# EAGLE board Ej6_EM (EAGLE 9.7.0)

Size 132.1 x 72.15 mm. Coordinates in mm from the lower left corner, seen from the top.
Outline: 0,0 132.1,0 132.1,72.15 0,72.15 0,0
Copper layers (1*16): Top 0.035mm / dielectric 1.5mm / Bottom 0.035mm
Design rules "default": minimum track width 6mil, minimum drill 0.35mm, track to track 6mil, track to pad 6mil, pad to pad 6mil, via to via 6mil, smd to smd 6mil, copper to edge 40mil, drill to drill 6mil, minimum pad ring 10mil, minimum via ring 8mil, stop-mask expansion 4mil, vias tented up to drill 0mil, thermal gap 10mil

## Footprints (pad centres in the part's own frame; a part is rotated, then mirrored left to right if it is on the bottom)
CAP-THRU-2.54MM = drill 1.016 pad 1.88: 1 -1.27,0; 2 1.27,0
LEDRD254W60D565H860B = drill 0.981 pad 1.581: 1 -1.27,0; 2 1.27,0
LEDRD254W60D565H860B_G = drill 0.981 pad 1.581: 1 -1.27,0; 2 1.27,0
INDRD2743W50D3810H2616B = drill 0.708 pad 1.308: 1 -13.716,0; 2 13.716,0
BATTERY-GENERIC = drill 1.118 pad 3.15 octagon: + 2.54,0; - -2.54,0
RESAD1016W63L850D250B = drill 0.83 pad 1.43: 1 -5.08,0; 2 5.08,0
HA-06-SM065 = drill 1 pad 1.676: 1 -2.54,-2.54; 2 0,2.54; 3 2.54,-2.54
SWITCH-SPDT-PTH-8.5X3.7MM = drill 1.016 pad 1.88: 1 -2.54,0; 2 0,0; 3 2.54,0

## Placement (x,y rotation side)
C1  100n  [CAP-THRU-2.54MM]  70.39,29.91 0 top
D1  RED  [LEDRD254W60D565H860B]  116.11,34.98 180 top
D2  RED  [LEDRD254W60D565H860B]  78.01,27.36 180 top
D3  GREEN  [LEDRD254W60D565H860B_G]  57.69,29.91 180 top
D4  RED  [LEDRD254W60D565H860B]  116.11,27.36 180 top
D5  GREEN  [LEDRD254W60D565H860B_G]  105.95,37.52 180 top
D6  GREEN  [LEDRD254W60D565H860B_G]  105.95,29.91 180 top
L1  10u  [INDRD2743W50D3810H2616B]  46.26,22.29 270 top
P1  BATTERYGENERIC  [BATTERY-GENERIC]  11.49,62.4 180 top
R1  1k  [RESAD1016W63L850D250B]  76.74,22.29 90 top
R2  1k  [RESAD1016W63L850D250B]  56.42,22.29 90 top
R3  1k  [RESAD1016W63L850D250B]  71.66,22.29 90 top
R4  1k  [RESAD1016W63L850D250B]  114.84,22.29 90 top
R5  1k  [RESAD1016W63L850D250B]  104.68,22.29 90 top
RPOT1  100k  [HA-06-SM065]  125.05,65.1 0 top
S1  TOGGLE  [SWITCH-SPDT-PTH-8.5X3.7MM]  7.42,43.29 0 top

## Library data of the parts
C1 P1 R1-R5 RPOT1 S1 = Tinkercad
D1 D2 D4 = Tinkercad; CATEGORY: Opto-Electronic; SUB-CATEGORY: LED; VALUE: LED_RED
D3 D5 D6 = Tinkercad; CATEGORY: Opto-Electronic; SUB-CATEGORY: LED; VALUE: LED_GREEN
L1 = Tinkercad; CATEGORY: Inductor; SUB-CATEGORY: Fixed

## Nets
D2_C: D2.2 R1.2
D3_C: D3.2 R2.2
D4_A: D1.1 D4.1 RPOT1.3
D4_C: D1.2 D4.2 R4.2
D5_A: D5.1 D6.1 RPOT1.1
D5_C: D5.2 D6.2 R5.2
P1+: P1.+ S1.2
P1-: P1.- R1.1 R2.1 R3.1 R4.1 R5.1
R3_2: C1.2 R3.2
S1_S: C1.1 L1.2 RPOT1.2 S1.3

## Tracks (layer width: path | path; a pad name or v marks a point on that pad's centre or on a via)
D2_C  (1 unrouted)
D3_C  (1 unrouted)
D4_A  (2 unrouted)
D4_C  (2 unrouted)
D5_A  (2 unrouted)
D5_C  (2 unrouted)
P1+  (1 unrouted)
P1-  (5 unrouted)
R3_2  (1 unrouted)
S1_S  (3 unrouted)